# Altium PCB PCB_Octogon.PcbDoc
Units mm, origin at the board's own origin, x right, y up, seen from the top; angles counter-clockwise.
Board outline 123.02 x 122.64 mm, 2 copper layers (Top Layer, Bottom Layer); 71 components, 83 nets, 283 pads, 86 vias.
Unrouted connection lines stored in the file: 87.
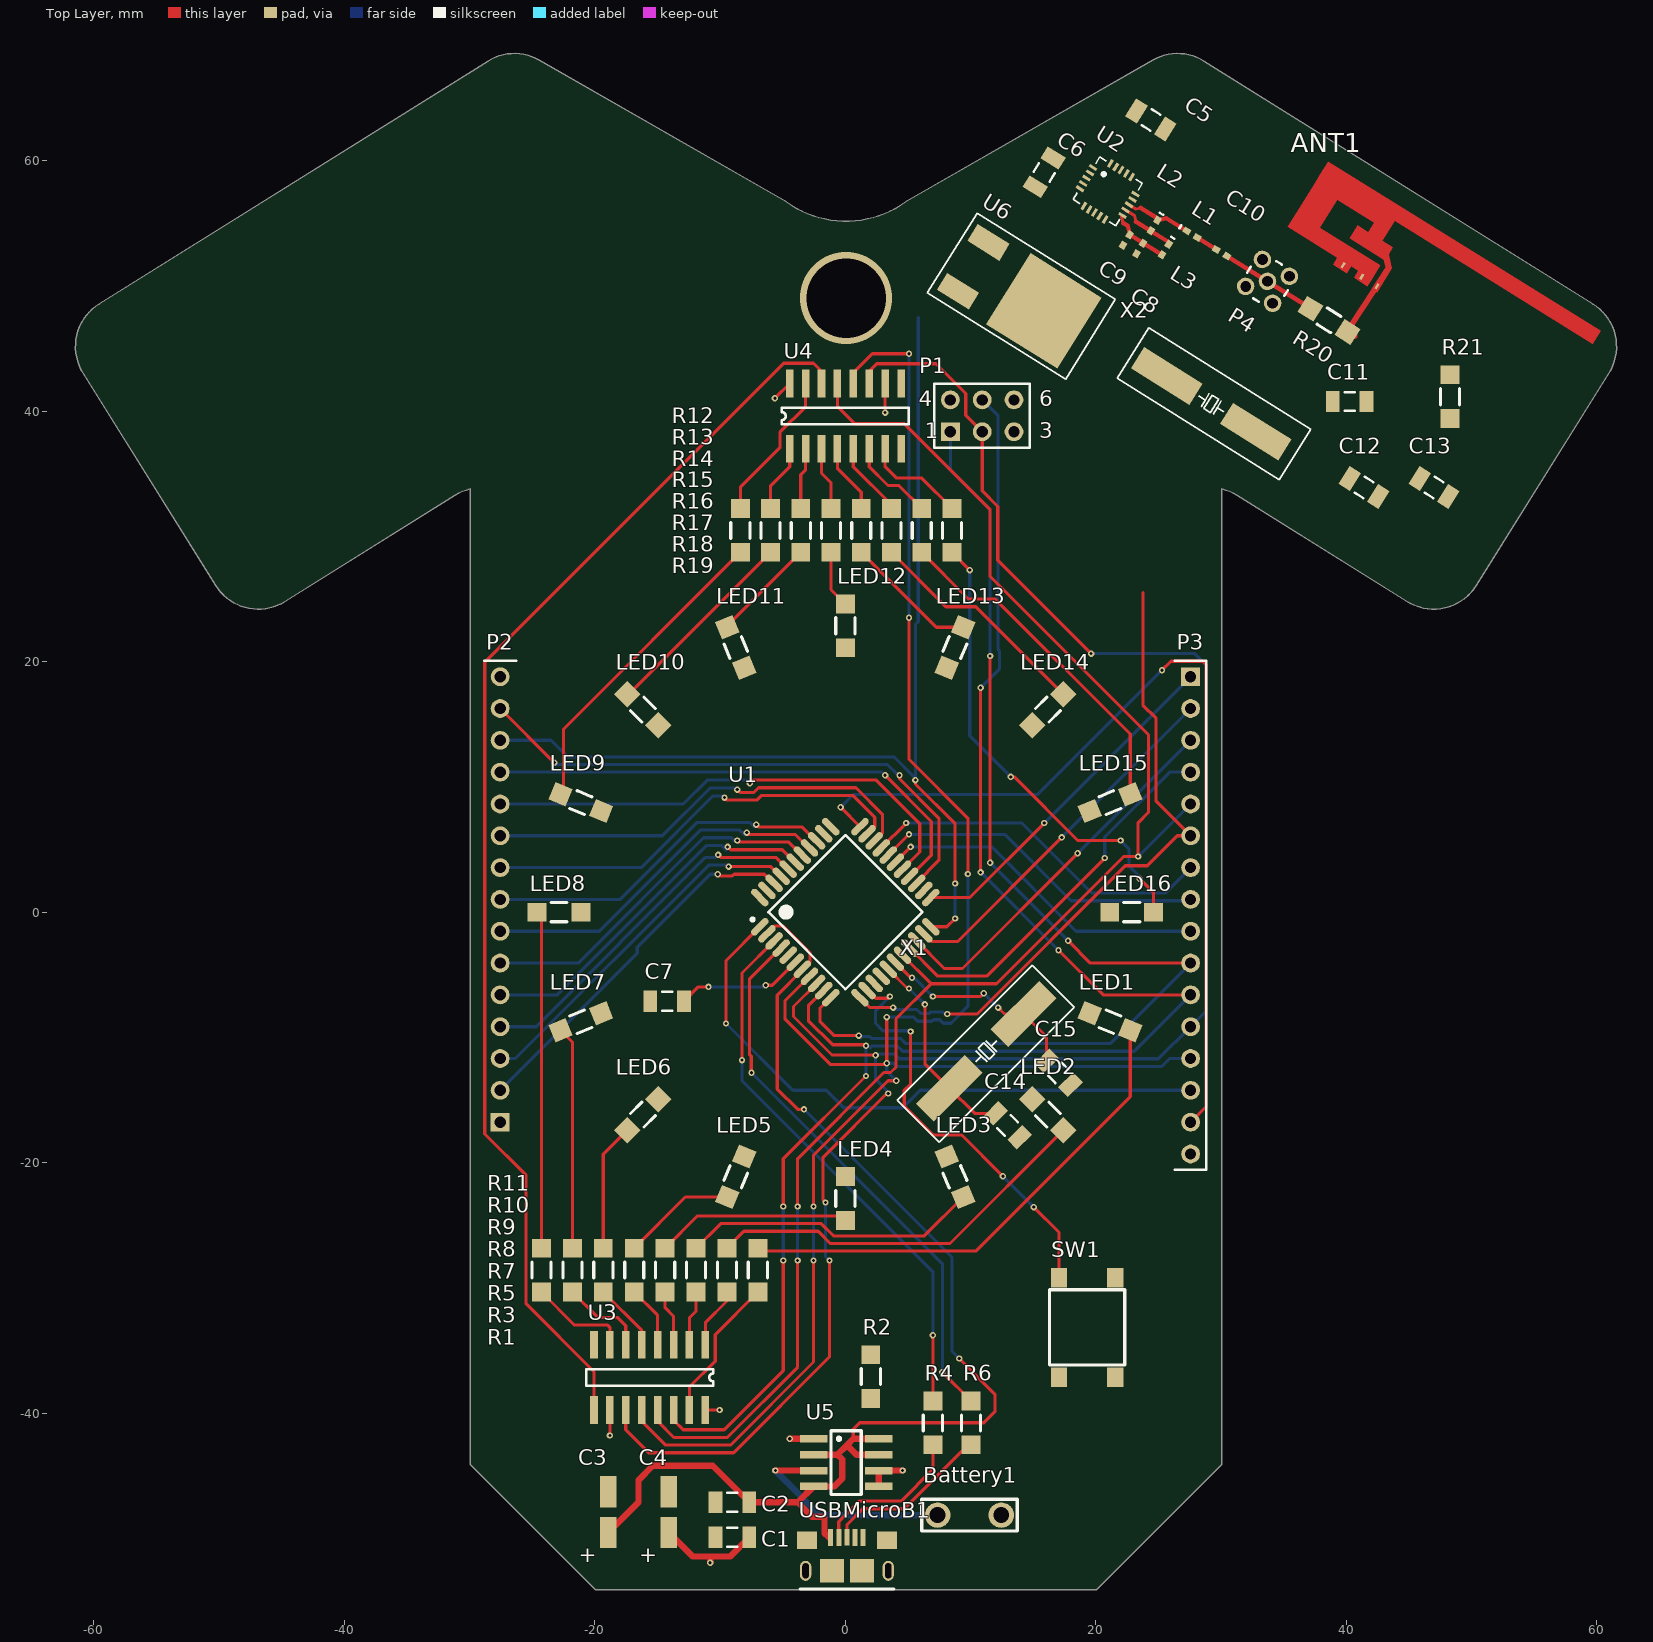
[diagram p0: Top Layer view]
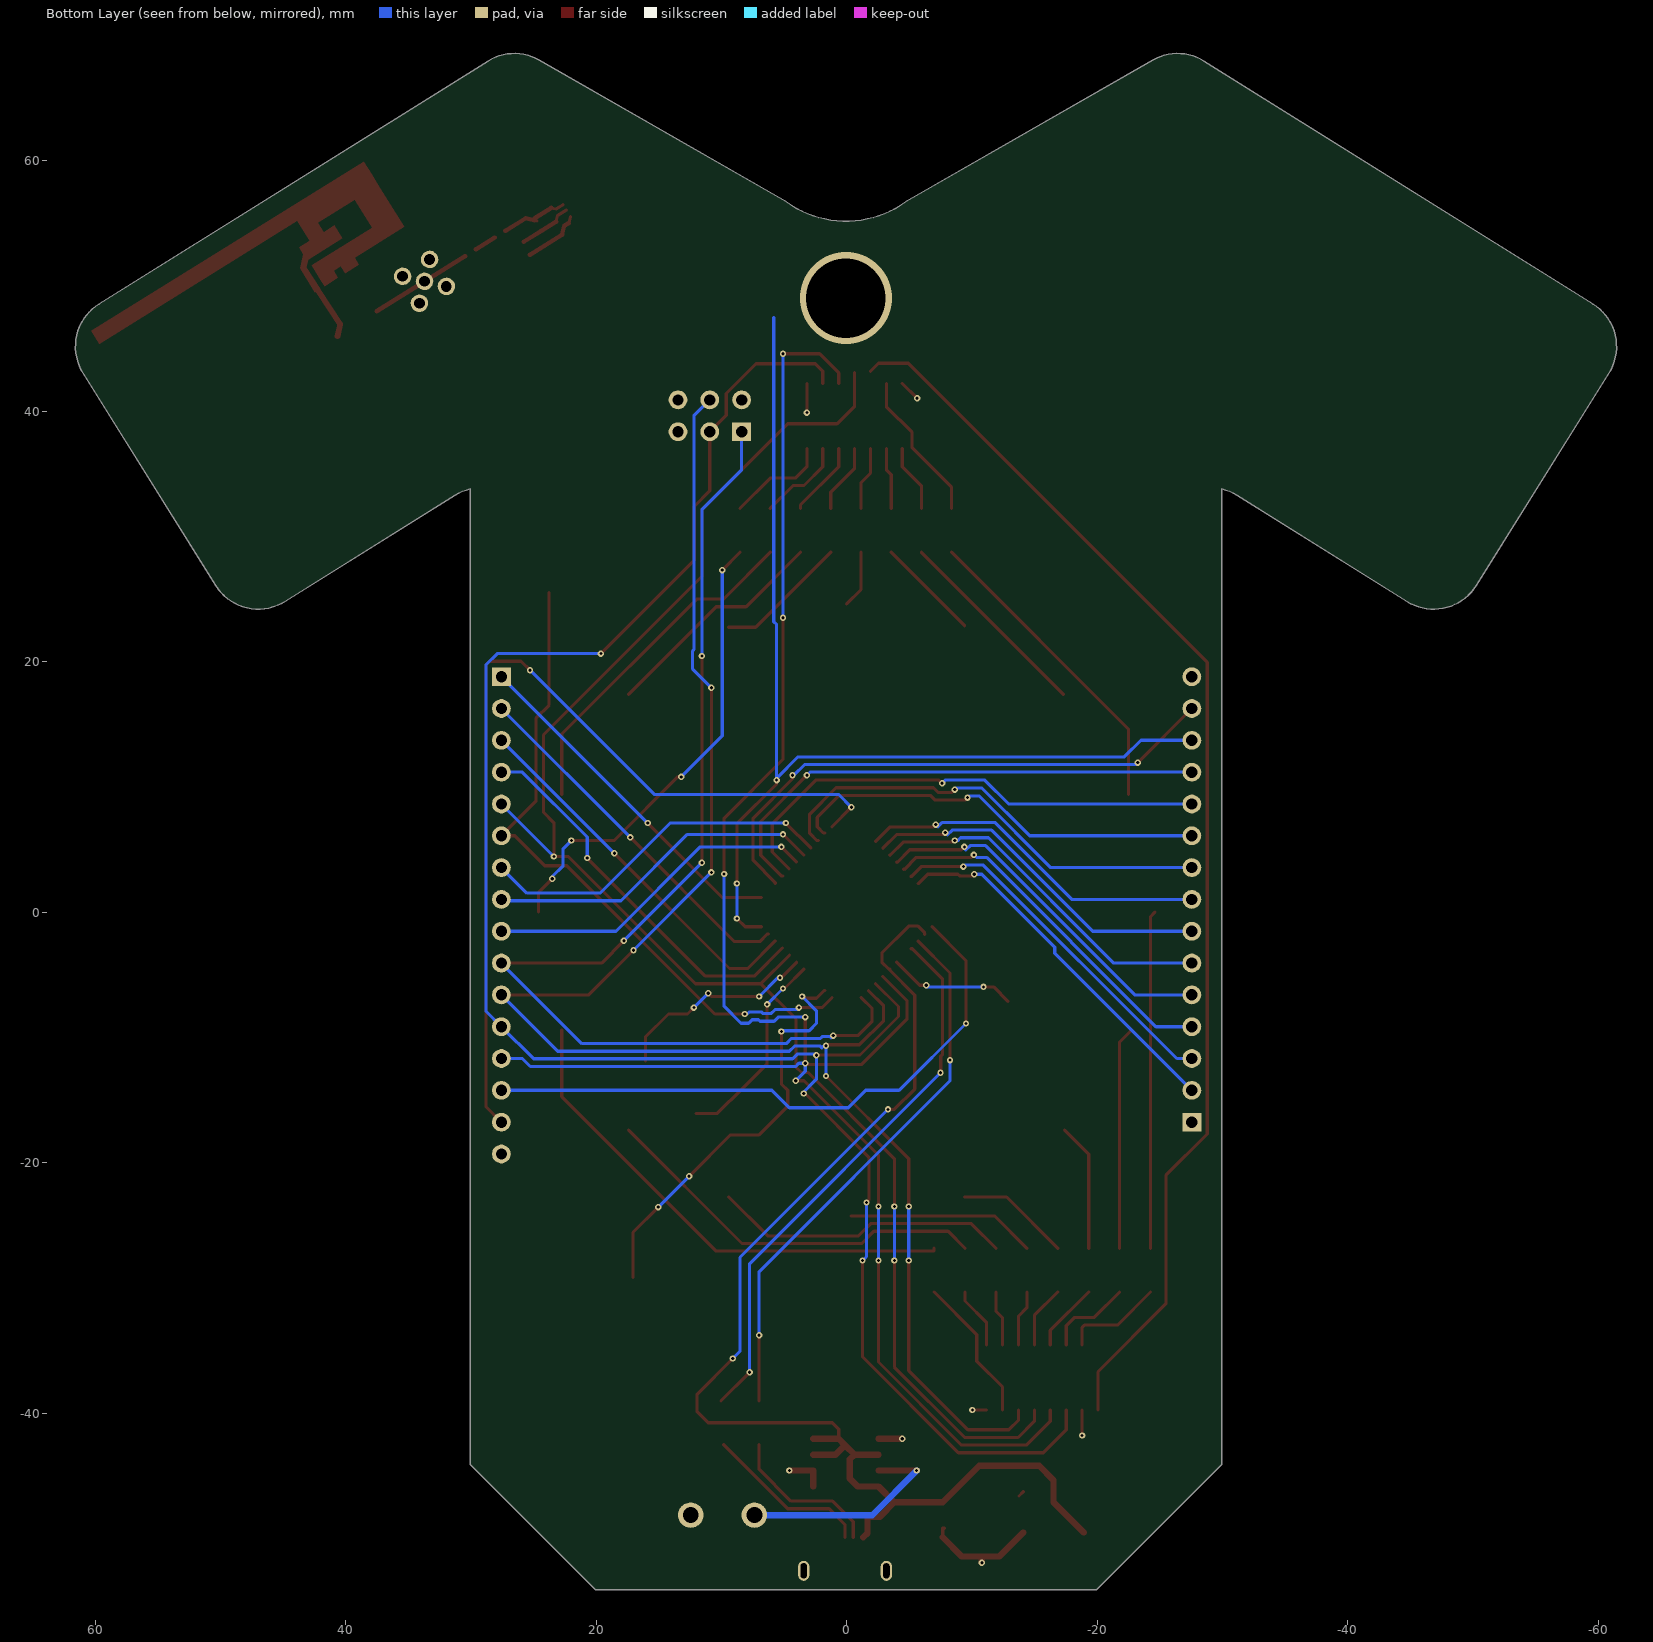
[diagram p1: Bottom Layer view, seen from below]

## Layer stack, top to bottom
Top Solder: solder mask 0.0102, Solder Resist, Dk 3.5
Top Layer: signal copper 0.0356
Dielectric 1: dielectric 0.32, FR-4, Dk 4.8
Bottom Layer: signal copper 0.0356
Bottom Solder: solder mask 0.0102, Solder Resist, Dk 3.5

## Board outline
-50.255,26.07 ccw(c-46.863,28.19) -44.744,24.798 -31.175,33.276 cw(c-29.055,29.884) -29.949,33.783 -29.949,-44.096 -19.949,-54.096 20.051,-54.096 30.051,-44.096 30.051,33.783 cw(c29.157,29.884) 31.277,33.276 44.846,24.798 ccw(c46.965,28.19) 50.358,26.07 60.956,43.031 ccw(c57.564,45.151) 59.683,48.543 28.641,67.941 ccw(c26.521,64.549) 24.532,68.019 4.847,56.736 cw(c0.051,63.218) -4.745,56.736 -24.43,68.019 ccw(c-26.419,64.549) -28.538,67.941 -59.581,48.543 ccw(c-57.462,45.151) -60.854,43.031

## Design rules (kind name [scope] priority, off if disabled: settings)
Clearance Clearance_1 [All] p1: gap=0.356
Clearance Clearance_Silk [(IsFill AND OnLayer('Top Overlay')) vs IsPad] p2: gap=0.254
PolygonConnect [All] p1: connectstyle=Relief reliefconductorwidth=0.254 reliefentries=4 polygonreliefangle="90 Angle" airgapwidth=0.254
RoomDefinition MainBoard [InComponentClass('MainBoard')] p1: confinementstyle=ConfineIn formatcopy=TRUE lockcomponents=FALSE outline 104.902,-85.979 225.044,-85.979 225.044,-42.291 104.902,-42.291
RoutingVias [All] p1: holewidth=0.254 width=0.508 viastyle="Through Hole" minholewidth=0.254 minwidth=0.508 maxholewidth=0.254 maxwidth=0.508
SolderMaskExpansion [All] p1: expansion=0.102
UnpouredPolygon [All] p1: allowunpoured=FALSE
Width [All] p1: maxlimit=1.5 minlimit=0.254 preferedwidth=0.254
29 further rules are at their usual default settings.

## Components (designator, comment, footprint, x,y, rotation, side; value= is the part's Value field where it differs from the comment)
ANT1 "INV_F_ANTENNA" INV_F_PCB_ANTENNA 35.179,54.737 r328 top
Battery1 "PowerPins" PowerPins_PCB 9.906,-48.133 r0 top
C1 "Cap Semi" C1206 -9.017,-49.911 r0 top
C2 "Cap Semi" C1206 -9.017,-47.117 r0 top
C3 "Electrolytic Capacitor" sheityCapPackage -18.923,-49.149 r0 top
C4 "Electrolytic Capacitor" sheityCapPackage -14.097,-49.149 r0 top
C5 "Cap Semi" C1206 24.384,63.246 r148 top
C6 "Cap Semi" C1206 15.875,59.055 r238 top
C7 "Cap Semi" C1206 -14.224,-7.112 r180 top
C8 "Cap Semi" 0402 23.509,52.977 r58 top
C9 "Cap Semi" 0402 22.432,53.65 r58 top
C10 "Cap Semi" 0402 30.038,52.641 r148 top
C11 "Cap Semi" C1206 40.259,40.767 r0 top
C12 "Cap Semi" C1206 41.402,33.909 r328 top
C13 "Cap Semi" C1206 46.99,33.909 r328 top
C14 "Cap Semi" C1206 12.954,-17.018 r315 top
C15 "Cap Semi" C1206 17.018,-12.827 r315 top
L1 "Inductor" 0402-A 27.669,54.122 r328 top
L2 "Inductor" 0402-A 24.653,54.808 r238 top
L3 "Inductor" 0402-A 25.555,52.896 r238 top
LED1 "LED_Green_1206Package" 1206Package_PCB 21.12,-8.748 r157.5 top
LED2 "LED_Green_1206Package" 1206Package_PCB 16.164,-16.164 r135 top
LED3 "LED_Green_1206Package" 1206Package_PCB 8.748,-21.12 r112.5 top
LED4 "LED_Green_1206Package" 1206Package_PCB 0,-22.86 r90 top
LED5 "LED_Green_1206Package" 1206Package_PCB -8.748,-21.12 r67.5 top
LED6 "LED_Green_1206Package" 1206Package_PCB -16.164,-16.164 r45 top
LED7 "LED_Green_1206Package" 1206Package_PCB -21.12,-8.748 r22.5 top
LED8 "LED_Green_1206Package" 1206Package_PCB -22.86,0 r0 top
LED9 "LED_Green_1206Package" 1206Package_PCB -21.12,8.748 r337.5 top
LED10 "LED_Green_1206Package" 1206Package_PCB -16.164,16.164 r315 top
LED11 "LED_Green_1206Package" 1206Package_PCB -8.748,21.12 r292.5 top
LED12 "LED_Green_1206Package" 1206Package_PCB 0,22.86 r270 top
LED13 "LED_Green_1206Package" 1206Package_PCB 8.748,21.12 r247.5 top
LED14 "LED_Green_1206Package" 1206Package_PCB 16.164,16.164 r225 top
LED15 "LED_Green_1206Package" 1206Package_PCB 21.12,8.748 r202.5 top
LED16 "LED_Green_1206Package" 1206Package_PCB 22.86,0 r180 top
P1 "Header 3X2A" HDR2X3_CEN 8.382,38.354 r0 top
P2 "Header 15" HDR1X15 -27.559,-16.764 r90 top
P3 "Header 16" HDR1X16 27.559,18.796 r270 top
P4 "COAX-M" MMCX2.54-V5 33.7,50.353 r328 top
R1 "Resistor_1206Package" 1206Package_PCB -6.985,-28.575 r90 top
R2 "Resistor_1206Package" 1206Package_PCB 2.032,-37.084 r270 top
R3 "Resistor_1206Package" 1206Package_PCB -9.452,-28.575 r90 top
R4 "Resistor_1206Package" 1206Package_PCB 6.985,-40.767 r270 top
R5 "Resistor_1206Package" 1206Package_PCB -11.92,-28.575 r90 top
R6 "Resistor_1206Package" 1206Package_PCB 10.033,-40.767 r270 top
R7 "Resistor_1206Package" 1206Package_PCB -14.387,-28.575 r90 top
R8 "Resistor_1206Package" 1206Package_PCB -16.855,-28.575 r90 top
R9 "Resistor_1206Package" 1206Package_PCB -19.322,-28.575 r90 top
R10 "Resistor_1206Package" 1206Package_PCB -21.79,-28.575 r90 top
R11 "Resistor_1206Package" 1206Package_PCB -24.257,-28.575 r90 top
R12 "Resistor_1206Package" 1206Package_PCB -8.382,30.48 r270 top
R13 "Resistor_1206Package" 1206Package_PCB -5.969,30.48 r270 top
R14 "Resistor_1206Package" 1206Package_PCB -3.556,30.48 r270 top
R15 "Resistor_1206Package" 1206Package_PCB -1.143,30.48 r270 top
R16 "Resistor_1206Package" 1206Package_PCB 1.27,30.48 r270 top
R17 "Resistor_1206Package" 1206Package_PCB 3.683,30.48 r270 top
R18 "Resistor_1206Package" 1206Package_PCB 6.096,30.48 r270 top
R19 "Resistor_1206Package" 1206Package_PCB 8.509,30.48 r270 top
R20 "Resistor_1206Package" 1206Package_PCB 38.608,47.244 r328 top
R21 "Resistor_1206Package" 1206Package_PCB 48.26,41.148 r90 top
SW1 "PushButton" TactileSwitchPCB 19.304,-33.147 r90 top
U1 "ATmega32U4-AU" 44ML_N 0,0 r45 top
U2 "nRF24L01+" 20-VFQFN 19.039,56.369 r328 top
U3 "8BitShiftReg" 16-SOIC -11.176,-34.544 r270 top
U4 "8BitShiftReg" 16-SOIC -4.445,37 r90 top
U5 "DualNP-ChFET" 8-SOIC -2.54,-45.847 r0 top
U6 "LD1117DT33TR" DPAK 11.43,53.467 r238 top
USBMicroB1 "Micro USB Receptacle Type B" USBMicroB_PCB 0.127,-52.578 r0 top
X1 "HC-49S" HC-49S 14.224,-8.128 r225 top
X2 "HC-49S" HC-49S 25.654,42.799 r328 top

## Footprints (in the part's own frame and the unit in brackets; to place one, negate y for a bottom-side part, rotate by r counter-clockwise, add the part's x,y. Pads: shape width x height; smd on the part's side, far side on the other; paste and mask are expansions set on the pad)
8-SOIC [mm]
  rect 2.2x0.6 smd: 1(0,3.81) 2(0,2.54) 3(0,1.27) 4(0,0) 5(5.2,0) 6(5.2,1.27) 7(5.2,2.54) 8(5.2,3.81)
  silkscreen extent 1.4,-0.64 3.81,4.44
16-SOIC [mm]
  rect 2.2x0.6 smd: 1(0,0) 2(0,-1.27) 3(0,-2.54) 4(0,-3.81) 5(0,-5.08) 6(0,-6.35) 7(0,-7.62) 8(0,-8.89) 9(5.2,-8.89) 10(5.2,-7.62) 11(5.2,-6.35) 12(5.2,-5.08) 13(5.2,-3.81) 14(5.2,-2.54) 15(5.2,-1.27) 16(5.2,0)
  silkscreen extent 1.94,-9.53 3.27,0.64
20-VFQFN [mm] "The package"
  rect 0.7x0.25 smd: 1(-1,3) 2(-1,2.5) 3(-1,2) 4(-1,1.5) 5(-1,1) 11(3,1) 12(3,1.5) 13(3,2) 14(3,2.5) 15(3,3)
  rect 0.25x0.7 smd: 6(0,0) 7(0.5,0) 8(1,0) 9(1.5,0) 10(2,0) 16(2,4) 17(1.5,4) 18(1,4) 19(0.5,4) 20(0,4)
  silkscreen extent -1,0 3,4
44ML_N [mm] "Thin QFP, 44-Leads, Body 10x10mm, Pitch 0.8mm, IPC Medium Density"
  oval 1.75x0.55 smd: 1(-5.65,4) 2(-5.65,3.2) 3(-5.65,2.4) 4(-5.65,1.6) 5(-5.65,0.8) 6(-5.65,0) 7(-5.65,-0.8) 8(-5.65,-1.6) 9(-5.65,-2.4) 10(-5.65,-3.2) 11(-5.65,-4) 23(5.65,-4) 24(5.65,-3.2) 25(5.65,-2.4) 26(5.65,-1.6) 27(5.65,-0.8) 28(5.65,0) 29(5.65,0.8) 30(5.65,1.6) 31(5.65,2.4) 32(5.65,3.2) 33(5.65,4)
  oval 0.55x1.75 smd: 12(-4,-5.65) 13(-3.2,-5.65) 14(-2.4,-5.65) 15(-1.6,-5.65) 16(-0.8,-5.65) 17(0,-5.65) 18(0.8,-5.65) 19(1.6,-5.65) 20(2.4,-5.65) 21(3.2,-5.65) 22(4,-5.65) 34(4,5.65) 35(3.2,5.65) 36(2.4,5.65) 37(1.6,5.65) 38(0.8,5.65) 39(0,5.65) 40(-0.8,5.65) 41(-1.6,5.65) 42(-2.4,5.65) 43(-3.2,5.65) 44(-4,5.65)
  silkscreen extent -5.77,-4.35 4.35,4.95, body extent -5,-5 5,5, height 1.2
0402 [mm] "Chip Capacitor, Body 1.0x0.5mm, IPC High Density"
  rect 0.6x0.5 smd: 1(-0.5,0) 2(0.5,0)
  body extent -0.55,-0.3 0.55,0.3, height 1.3
0402-A [mm] "Chip Inductor, Body 1.0x0.5mm, IPC High Density"
  rect 0.6x0.5 smd: 1(-0.5,0) 2(0.5,0)
  silkscreen extent -1.1,-0.15 -1.1,0.15, body extent -0.55,-0.3 0.55,0.3, height 0.55
1206Package_PCB [mm]
  rect 1.5x1.5 smd: 1(-1.75,0) 2(1.75,0)
  silkscreen extent -0.64,-0.76 0.64,0.76
C1206 [mm] "Chip Capacitor, Body 3.2x1.6mm, IPC High Density"
  rect 1.1x1.7 smd: 1(-1.35,0) 2(1.35,0)
  silkscreen extent -0.4,-0.75 0.4,0.75, body extent -1.7,-0.9 1.7,0.9, height 1.3
DPAK [mm]
  rect 1.6x3 smd: 1(0,0) 3(4.6,0)
  rect 6.7x6.7 smd: 2(2.3,6.65)
  silkscreen extent -1.5,-2 6,11
HC-49S [mm]
  rect 5.5x2 smd: 1(0,0) 2(8.375,0)
  silkscreen extent -3.25,-2.25 12,2.5
HDR1X15 [mm] "Connector; Header; 15 Position"
  rect 1.5x1.5 hole 0.9: 1(0,0)
  round 1.5 hole 0.9: 2(2.54,0) 3(5.08,0) 4(7.62,0) 5(10.16,0) 6(12.7,0) 7(15.24,0) 8(17.78,0) 9(20.32,0) 10(22.86,0) 11(25.4,0) 12(27.94,0) 13(30.48,0) 14(33.02,0) 15(35.56,0)
  silkscreen extent 36.83,-1.27 36.83,1.27
HDR1X16 [mm] "Connector; Header; 16 Position"
  rect 1.5x1.5 hole 0.9: 1(0,0)
  round 1.5 hole 0.9: 2(2.54,0) 3(5.08,0) 4(7.62,0) 5(10.16,0) 6(12.7,0) 7(15.24,0) 8(17.78,0) 9(20.32,0) 10(22.86,0) 11(25.4,0) 12(27.94,0) 13(30.48,0) 14(33.02,0) 15(35.56,0) 16(38.1,0)
  silkscreen extent -1.27,-1.27 39.37,1.27
HDR2X3_CEN [mm] "Connector; Header; 3x2 Position"
  rect 1.5x1.5 hole 0.9: 1(0,0)
  round 1.5 hole 0.9: 2(2.54,0) 3(5.08,0) 4(0,2.54) 5(2.54,2.54) 6(5.08,2.54)
  silkscreen extent -1.27,-1.27 6.35,3.81
INV_F_PCB_ANTENNA [mm]
  rect 0.2x0.5 smd: 1(5.5,-0.2) 2(7.25,-0.2) 3(8.696,-0.2)
  Top Layer region: 0.127,0.043 0.127,0.04 0.129,0.038 0.131,0.037 0.133,0.036 0.133,0.036 4.81,0.047 4.81,-0.598 4.811,-0.6 4.812,-0.602 4.814,-0.604 4.817,-0.604 4.817,-0.604 6.077,-0.601 6.081,-0.6 6.083,-0.598 6.084,-0.595 6.084,-0.595 6.084,0.05 6.775,0.052 6.775,-0.593 6.776,-0.596 6.777,-0.598 6.779,-0.599 6.782,-0.6 6.782,-0.6 8.016,-0.597 8.02,-0.596 8.022,-0.593 8.023,-0.59 8.023,-0.59 8.023,-0.033 8.023,1.343 8.022,1.346 8.021,1.348 8.019,1.35 8.016,1.35 8.016,1.35 2.32,1.337 2.32,3.977 5.81,3.985 5.81,3.109 4.817,3.107 4.814,3.106 4.811,3.103 4.81,3.1 4.81,3.1 4.81,1.897 4.811,1.895 4.812,1.893 4.814,1.891 4.817,1.891 4.817,1.891 8.014,1.898 8.459,1.456 8.459,-0.589 8.46,-0.592 8.461,-0.594 8.463,-0.595 8.466,-0.596 8.466,-0.596 8.926,-0.595 8.929,-0.594 8.932,-0.591 8.933,-0.588 8.933,-0.588 8.933,1.649 8.932,1.652 8.931,1.654 8.931,1.654 8.931,1.654 8.931,1.654 8.931,1.654 8.931,1.654 8.931,1.654 8.118,2.46 8.118,3.108 8.118,3.11 8.116,3.112 8.114,3.114 8.112,3.114 8.112,3.114 7.119,3.112 7.119,3.995 7.119,4.982 25.708,5.026 25.711,5.027 25.713,5.029 25.714,5.032 25.714,5.032 25.714,6.235 25.714,6.238 25.712,6.24 25.71,6.241 25.708,6.242 25.708,6.242 0.134,6.182 0.13,6.181 0.128,6.179 0.127,6.176 0.127,6.176 0.127,4.973 0.127,3.979 0.127,1.325
MMCX2.54-V5 [mm] "Connector; RF Coaxial, MMCX, Thru-Hole; 5 Position; Vertical"
  round 1.4 hole 0.85: 1(0,0) 2(-1.27,-1.27) 3(1.27,-1.27) 4(1.27,1.27) 5(-1.27,1.27)
  silkscreen extent -1.75,-1.75 1.75,1.75
PowerPins_PCB [mil]
  round 80 hole 50: 1(-100,0) 2(100,0)
  silkscreen extent -150,-50 150,50
sheityCapPackage [mm] "This is jank"
  rect 1.3x2.5 smd: 1(0,-0.375) 2(0,2.875)
TactileSwitchPCB [mm]
  rect 1.55x1.3 smd: 1(-3.975,2.25) 2(3.975,2.25) 3(-3.975,-2.25) 4(3.975,-2.25)
  silkscreen extent -3,-3 3,3
USBMicroB_PCB [mm]
  rect 0.4x1.35 smd: 1(-1.3,2.667) 2(-0.65,2.667) 3(0,2.675) 4(0.65,2.667) 5(1.3,2.667)
  oval 0.9x1.6 hole 0.5 slot 1.2 at 90 deg: CASE(-3.3,0) CASE(3.3,0)
  rect 1.6x1.4 smd: CASE(-3.2,2.45) CASE(3.2,2.45)
  rect 1.9x1.9 smd: CASE(-1.2,0) CASE(1.2,0)
  silkscreen extent -3.75,-1.45 3.75,-1.45

## Part data
ANT1: library part INV_V_ANTENNA
C1 C2 C5 C6 C7 C8 C9 C10 C11 C12 C13 C14 C15: "Capacitor (Semiconductor SIM Model)"
C3 C4: "asdf"
LED1 LED2 LED3 LED4 LED5 LED6 LED7 LED8 LED9 LED10 LED11 LED12 LED13 LED14 LED15 LED16: "Green LED"
P1: "Header, 3-Pin, Dual row"
P2: "Header, 15-Pin"
P3: "Header, 16-Pin"
P4: "RF Coaxial PCB Connector, MMCX; Thru-Hole, Vertical Mount Plug,  50 Ohm Impedance"
R1 R2 R3 R4 R5 R6 R7 R8 R9 R10 R11 R12 R13 R14 R15 R16 R17 R18 R19 R20 R21: "Resistor 1206"
SW1: library part TactileButton, "Normally open push button."
U1: "8-bit AVR Microcontroller, 2.7-5.5V, 32KB Flash, 2.5KB EEPROM, 1KB SRAM, USB Controller, 44-pin TQFP, Industrial Grade (-40°C to 85°C)"
U2: "2.4GHz RF Transceiver"
U3 U4: library part 8BitShiftRegister
U5: library part "Dual N & P-Channel MOSFET"
USBMicroB1: library part USBMicroB

## Via types
v1: diameter 0.508, hole 0.254, Top Layer to Bottom Layer, 85 vias
v2: diameter 7.35, hole 6.35, Top Layer to Bottom Layer, 1 vias

## Nets (pads, with @x,y where several pads share a name; then routed paths per layer and width w, separated by ;. In a path a pad name is that pad's centre, name@x,y a point inside that pad or via, vN(x,y) a via of type N, cw(c..) or ccw(c..) an arc to the next point about the centre after c; other vN are vias at no path point)
3V3: C6.2 U2.7 U2.15 U2.18 U2.19 U6.2
ANT1: L2.2 L3.1 U2.12 | length 4.4
  Top Layer w0.254: U2.12 23.085,55.609 23.197,55.128
  Top Layer w0.356: 23.197,55.128 L2.2 L3.1@25.775,53.517
ANT2: L1.1 L2.1 U2.13 | length 5.4
  Top Layer w0.254: U2.13 23.195,56.13 23.589,56.221 ; L2.1@24.71,55.184 L2.1
  Top Layer w0.356: 23.589,56.221 L2.1@24.875,55.418 ; L2.1 25.629,55.396 L1.1
BATT: Battery1.1 U5.3 | length 17.5
  Top Layer w0.508: v1(-5.588,-44.577) U5.3
  Bottom Layer w0.508: v1(-5.588,-44.577) -2.032,-48.133 Battery1.1
D+: R6.1 U1.4 | length 44.5
  Top Layer w0.254: v1(-7.493,-12.827) -7.518,-12.802 -7.518,-11.506 -7.645,-11.379 -7.645,-5.323 -5.246,-2.924 U1.4@-5.127,-2.924 ; v1(7.747,-36.73) R6.1
  Bottom Layer w0.254: v1(-7.493,-12.827) 7.747,-28.067 v1(7.747,-36.73)
D-: R4.1 U1.3 | length 44.1
  Top Layer w0.254: v1(-8.255,-11.811) -8.255,-4.861 U1.3 ; R4.1 v1(6.985,-33.782)
  Bottom Layer w0.254: v1(-8.255,-11.811) -8.255,-13.462 6.985,-28.702 v1(6.985,-33.782)
GND: ANT1.1 ANT1.2 Battery1.2 C1.1 C2.1 C3.2 C4.2 C5.1 C6.1 C7.2 C8.1 C9.1 C11.2 C12.1 C13.1 C14.2 C15.2 LED1.2 LED2.2 LED3.2 LED4.2 LED5.2 LED6.2 LED7.2 LED8.2 LED9.2 LED10.2 LED11.2 LED12.2 LED13.2 LED14.2 LED15.2 LED16.2 P1.6 P2.15 P3.1 P4.2 P4.3 P4.4 P4.5 R2.1 R21.2 SW1.3 SW1.4 U1.5 U1.15 U1.23 U1.35 U1.43 U2.8 U2.14 U2.17 U2.20 U3.8 U4.8 U6.1 USBMicroB1.5 | length 28.5
  Top Layer w0.254: C4.2 C4.2@-13.762,-46.609 ; U1.23 9.93,1.167 v1(15.875,7.112)
  Bottom Layer w0.254: v1(15.875,7.112) P3.1
MISO: P1.1 P3.10 U1.11 U2.5 | length 90.4
  Top Layer w0.254: U1.11 -2.032,-7.689 -2.032,-8.717 -0.893,-9.855 v1(1.067,-9.855) ; v1(11.557,3.937) v1(11.557,20.447) ; v1(17.78,-2.286) 19.558,-4.064 P3.10
  Bottom Layer w0.254: v1(1.067,-9.855) 1.244,-10.033 1.346,-9.931 1.956,-9.931 2.109,-10.084 4.415,-10.084 4.822,-10.49 21.133,-10.49 P3.10 ; P1.1 8.382,35.306 11.557,32.131 v1(11.557,20.447) ; v1(11.557,3.937) v1(17.78,-2.286)
MOSI: P1.5 P3.11 U1.10 U2.4 U3.14 | length 136.7
  Top Layer w0.254: U3.14 -13.716,-40.556 -12.946,-41.327 -9.678,-41.327 -4.953,-36.602 v1(-4.953,-27.813) ; v1(-4.953,-23.495) -4.953,-19.685 v1(1.651,-13.081) ; U1.10 -2.948,-7.473 -2.948,-8.663 -1.019,-10.592 1.575,-10.592 v1(1.651,-10.668) ; v1(10.795,3.175) v1(10.795,17.907) ; v1(17.018,-3.048) 20.574,-6.604 P3.11
  Bottom Layer w0.254: v1(-4.953,-27.813) v1(-4.953,-23.495) ; v1(1.651,-13.081) v1(1.651,-10.668) 1.626,-10.693 1.856,-10.693 1.982,-10.819 2.108,-10.693 4.163,-10.693 4.569,-11.1 23.063,-11.1 P3.11 ; v1(10.795,3.175) v1(17.018,-3.048) ; v1(10.795,17.907) 12.294,19.406 12.294,20.854 12.192,20.955 12.192,39.624 P1.5
NetANT1_3: ANT1.3 R20.2 | length 5.6
  Top Layer w0.46: R20.2@40.64,45.974 40.438,46.948 42.956,50.78
NetC7_1: C7.1 U1.6 | length 10.2
  Top Layer w0.254: C7.1 -11.731,-5.969 v1(-10.922,-5.969) ; v1(-6.35,-5.842) -5.842,-5.842 U1.6
  Bottom Layer w0.254: v1(-10.922,-5.969) -6.35,-5.969 v1(-6.35,-5.842)
NetC10_1: C10.1 C11.1 P4.1 R20.1 | length 8.3
  Top Layer w0.356: C10.1 P4.1 R20.1@37.493,47.983
NetC10_2: C10.2 L1.2 | length 1.8
  Top Layer w0.356: L1.2 C10.2
NetC12_2: C12.2 U2.9 X2.1
NetC13_2: C13.2 U2.10 X2.2
NetC14_1: C14.1 U1.16 X1.2 | length 16.1
  Top Layer w0.254: U1.16 4.965,-6.096 v1(5.08,-6.096) ; v1(6.35,-7.366) 6.35,-12.098 X1.2 10.315,-16.063 C14.1
  Bottom Layer w0.254: v1(5.08,-6.096) v1(6.35,-7.366)
NetC15_1: C15.1 U1.17 X1.1 | length 16.7
  Top Layer w0.254: U1.17 5.232,-5.232 v1(5.322,-5.232) ; v1(6.985,-6.731) 10.795,-6.731 v1(11.049,-6.477) ; v1(12.192,-7.62) 12.7,-8.128 X1.1 16.063,-9.967 C15.1
  Bottom Layer w0.254: v1(5.322,-5.232) 5.486,-5.232 v1(6.985,-6.731) ; v1(11.049,-6.477) v1(12.192,-7.62)
NetLED1_1: LED1.1 R1.2 | length 40.4
  Top Layer w0.254: R1.2 -6.985,-27.062 10.403,-27.062 22.737,-14.728 LED1.1
NetLED2_1: LED2.1 R3.2 | length 31.6
  Top Layer w0.254: R3.2 -8.104,-25.476 -2.178,-25.476 -1.202,-26.452 8.352,-26.452 LED2.1
NetLED3_1: LED3.1 R5.2 | length 23.8
  Top Layer w0.254: R5.2 -9.961,-24.867 -1.926,-24.867 -0.95,-25.843 6.312,-25.843 LED3.1
NetLED4_1: LED4.1 R7.2 | length 15.1
  Top Layer w0.254: R7.2 -11.819,-24.257 LED4.1@-0.353,-24.257
NetLED5_1: LED5.1 R8.2 | length 9.1
  Top Layer w0.254: R8.2 -12.766,-22.737 LED5.1
NetLED6_1: LED6.1 R9.2 | length 10.2
  Top Layer w0.254: R9.2 -19.322,-19.322 LED6.1
NetLED7_1: LED7.1 R10.2 | length 17.8
  Top Layer w0.254: LED7.1 -21.79,-10.365 R10.2
NetLED8_1: LED8.1 R11.2 | length 27
  Top Layer w0.254: LED8.1 -24.257,-0.353 R11.2
NetLED9_1: LED9.1 R12.2 | length 25.2
  Top Layer w0.254: LED9.1@-22.504,9.418 -22.504,14.608 R12.2
NetLED10_1: LED10.1 R13.2 | length 16
  Top Layer w0.254: LED10.1@-17.297,17.402 R13.2
NetLED11_1: LED11.1 R14.2 | length 8.3
  Top Layer w0.254: LED11.1@-9.418,22.868 R14.2
NetLED12_1: LED12.1 R15.2 | length 4.6
  Top Layer w0.254: R15.2 -1.143,25.753 LED12.1
NetLED13_1: LED13.1 R16.2 | length 10.6
  Top Layer w0.254: R16.2 7.263,22.737 LED13.1
NetLED14_1: LED14.1 R17.2 | length 18.4
  Top Layer w0.254: R17.2 8.029,24.384 10.42,24.384 LED14.1
NetLED15_1: LED15.1 R18.2 | length 27.5
  Top Layer w0.254: R18.2 9.832,24.994 11.963,24.994 22.737,14.22 LED15.1
NetLED16_1: LED16.1 R19.2 | length 37.6
  Top Layer w0.254: R19.2 v1(9.934,27.305) ; v1(13.208,10.795) 13.488,10.795 18.568,5.715 v1(21.971,5.715) ; v1(23.495,2.667) 24.61,1.552 LED16.1
  Bottom Layer w0.254: v1(9.934,27.305) 9.934,14.069 v1(13.208,10.795) ; v1(21.971,5.715) 22.631,5.055 22.631,3.708 23.495,2.845 v1(23.495,2.667)
NetP2_2: P2.2 U1.42 | length 29.7
  Top Layer w0.254: v1(-10.185,3.023) -10.058,2.896 -9.017,2.896 -8.89,3.023 -6.477,3.023 -5.752,2.298 U1.42
  Bottom Layer w0.254: P2.2 -16.612,-3.277 -16.612,-2.795 -10.794,3.023 v1(-10.185,3.023)
NetP2_3: P2.3 U1.41 | length 29.2
  Top Layer w0.254: v1(-9.322,3.632) -5.955,3.632 -5.157,2.834 U1.41
  Bottom Layer w0.254: P2.3 -26.362,-11.684 -10.919,3.759 -9.449,3.759 v1(-9.322,3.632)
NetP2_4: P2.4 U1.40 | length 29.2
  Top Layer w0.254: v1(-10.16,4.572) -9.957,4.369 -5.56,4.369 -4.591,3.399 U1.40
  Bottom Layer w0.254: P2.4 -24.684,-9.144 -11.172,4.369 -10.363,4.369 v1(-10.16,4.572)
NetP2_5: P2.5 U1.39 | length 29.3
  Top Layer w0.254: v1(-9.398,5.207) -9.169,4.978 -5.038,4.978 -4.025,3.965 U1.39
  Bottom Layer w0.254: P2.5 -23.006,-6.604 -11.094,5.309 -9.855,5.309 -9.512,4.966 -9.398,5.08 v1(-9.398,5.207)
NetP2_6: P2.6 U1.38 | length 28.9
  Top Layer w0.254: v1(-8.636,5.715) -8.509,5.588 -4.517,5.588 -3.459,4.531 U1.38
  Bottom Layer w0.254: P2.6 -21.329,-4.064 -11.321,5.944 -9.093,5.944 -8.864,5.715 v1(-8.636,5.715)
NetP2_7: P2.7 U1.37 | length 28.8
  Top Layer w0.254: v1(-7.874,6.35) -7.722,6.198 -3.995,6.198 U1.37@-2.894,5.097
  Bottom Layer w0.254: P2.7 -19.651,-1.524 -11.573,6.553 -8.432,6.553 -8.052,6.172 v1(-7.874,6.35)
NetP2_8: P2.8 U1.36 | length 28.5
  Top Layer w0.254: v1(-7.112,6.985) -6.934,6.807 -3.473,6.807 U1.36@-2.328,5.662
  Bottom Layer w0.254: P2.8 -17.973,1.016 -11.826,7.163 -7.645,7.163 -7.29,6.807 v1(-7.112,6.985)
NetP2_9: P2.9 U1.32 | length 34.9
  Top Layer w0.254: v1(-9.652,9.144) -9.449,8.941 -7.062,8.941 -6.681,9.322 0.588,9.322 2.349,7.562 2.349,6.814 1.852,6.318 U1.32@1.732,6.318
  Bottom Layer w0.254: P2.9 -16.295,3.556 -10.58,9.271 -9.779,9.271 v1(-9.652,9.144)
NetP2_10: P2.10 U1.31 | length 35.7
  Top Layer w0.254: v1(-8.636,9.779) -8.407,9.55 -7.315,9.55 -6.934,9.931 0.841,9.931 ; 0.892,9.881 2.958,7.814 2.958,6.292 2.388,5.722 U1.31@2.268,5.722
  Bottom Layer w0.254: P2.10 -14.617,6.096 -10.807,9.906 -8.763,9.906 v1(-8.636,9.779)
NetP2_11: P2.11 U1.27 | length 40.1
  Top Layer w0.254: v1(-7.62,10.287) -7.366,10.541 2.462,10.541 5.944,7.059 5.944,4.801 U1.27@4.602,3.459
  Bottom Layer w0.254: P2.11 -12.939,8.636 -11.034,10.541 -7.874,10.541 v1(-7.62,10.287)
NetP2_12: P2.12 U1.26 | length 41.2
  Top Layer w0.254: v1(3.175,10.922) 6.858,7.239 6.858,4.535 5.216,2.894 U1.26@5.097,2.894
  Bottom Layer w0.254: P2.12 2.921,11.176 v1(3.175,10.922)
NetP2_14: P2.14 U1.25 | length 44.8
  Top Layer w0.254: P2.14 v1(-23.241,11.938) ; v1(4.318,10.922) 4.318,10.641 7.468,7.492 7.468,4.133 5.692,2.358 U1.25
  Bottom Layer w0.254: v1(-23.241,11.938) -23.089,11.786 3.353,11.786 4.217,10.922 v1(4.318,10.922)
NetP3_2: P3.2 U1.21 | length 29.3
  Top Layer w0.254: U1.21 6.318,-1.732 6.934,-2.349 8.954,-2.349 v1(17.272,5.969)
  Bottom Layer w0.254: v1(17.272,5.969) P3.2
NetP3_3: P3.3 U1.20 | length 30.3
  Top Layer w0.254: U1.20 7.89,-4.496 9.347,-4.496 v1(18.542,4.699)
  Bottom Layer w0.254: v1(18.542,4.699) P3.3
NetP3_4: P3.4 U1.19 | length 31.1
  Top Layer w0.254: U1.19 7.368,-5.105 11.278,-5.105 v1(20.701,4.318)
  Bottom Layer w0.254: v1(20.701,4.318) 20.701,5.996 25.881,11.176 P3.4
NetP3_7: P3.7 U1.30 | length 28.7
  Top Layer w0.254: U1.30 v1(4.849,7.112)
  Bottom Layer w0.254: v1(4.849,7.112) 14.097,7.112 19.685,1.524 25.527,1.524 P3.7
NetP3_8: P3.8 U1.29 | length 27
  Top Layer w0.254: U1.29 v1(5.08,6.211)
  Bottom Layer w0.254: v1(5.08,6.211) 12.712,6.211 18.009,0.914 27.457,0.914 P3.8
NetP3_9: P3.9 U1.28 | length 26.9
  Top Layer w0.254: U1.28 v1(5.207,5.207)
  Bottom Layer w0.254: v1(5.207,5.207) 11.684,5.207 18.415,-1.524 P3.9
NetR4_2: R4.2 USBMicroB1.2 | length 12.5
  Top Layer w0.254: USBMicroB1.2 -0.523,-48.656 1.118,-47.015 4.446,-47.015 6.985,-44.477 R4.2
NetR6_2: R6.2 USBMicroB1.3 | length 13.3
  Top Layer w0.254: USBMicroB1.3 0.127,-48.895 1.397,-47.625 4.699,-47.625 R6.2@9.807,-42.517
NetR21_1: R21.1 U2.16
NetU3_9: U3.9 U4.14 | length 100.3
  Top Layer w0.254: U3.9 -20.066,-36.699 -25.49,-31.275 -25.49,-21.016 -28.792,-17.714 -28.792,19.936 -4.912,43.815 -2.54,43.815 U4.14@-1.905,43.18
PB7: P3.6 U1.12 U2.6 | length 54.1
  Top Layer w0.254: U1.12 1.963,-7.62 v1(3.81,-7.62) ; v1(8.128,-8.128) 10.514,-8.128 22.351,3.708 24.105,3.708 26.492,6.096 P3.6 24.809,8.846 24.809,15.467 23.749,16.527 23.749,25.527
  Bottom Layer w0.254: v1@3.81,-7.747 v1(3.81,-7.62) 3.962,-7.772 5.715,-7.772 6.045,-8.103 6.655,-8.103 6.782,-7.976 7.796,-7.976 7.948,-8.128 v1(8.128,-8.128)
PD0: P3.5 U1.18 U3.13 U4.13 | length 131.7
  Top Layer w0.254: U3.13 -14.986,-40.64 -13.69,-41.936 -9.425,-41.936 -3.81,-36.321 v1(-3.81,-27.813) ; v1(-3.81,-23.495) -3.81,-19.685 3.073,-12.802 3.607,-12.802 4.039,-12.37 4.039,-8.523 6.846,-5.715 ; U4.13@-0.635,43.086 U4.13 -0.635,40.386 0.762,38.989 4.699,38.989 11.557,32.131 11.557,26.797 24.199,14.155 24.199,7.981 23.368,7.15 v1(23.368,4.445) 22.225,4.445 12.065,-5.715 6.846,-5.715 ; U1.18 6.846,-5.715
  Bottom Layer w0.254: v1(-3.81,-27.813) v1(-3.81,-23.495) ; v1(23.368,4.445) P3.5
PD5: P2.13 U1.22 U2.1 | length 86
  Top Layer w0.254: v1(5.588,10.541) 5.588,10.233 8.763,7.058 v1(8.763,2.286) ; U1.22 8.104,-1.167 v1(8.763,-0.508)
  Bottom Layer w0.254: P2.13 -23.495,13.716 -22.174,12.395 3.887,12.395 v1@5.588,10.694 ; v1(5.588,10.541) v1@5.588,10.694 ; 5.817,47.473 5.817,23.19 5.588,22.961 v1@5.588,10.694 ; v1(8.763,-0.508) v1(8.763,2.286)
PE2: P3.15 U1.33 | length 73.3
  Top Layer w0.254: v1(-0.381,8.371) U1.33 ; v1(25.273,19.304) 25.998,20.029 28.509,20.029 28.792,19.746 28.792,-15.531 P3.15
  Bottom Layer w0.254: v1(-0.381,8.371) 0.646,9.398 15.367,9.398 v1(25.273,19.304)
PE6: P3.14 U1.1 | length 49.3
  Top Layer w0.254: v1(-9.525,-8.89) -9.525,-3.868 U1.1
  Bottom Layer w0.254: v1(-9.525,-8.89) -4.191,-14.224 -1.524,-14.224 -0.127,-15.621 4.572,-15.621 5.969,-14.224 P3.14
Q0: R1.1 U3.15 | length 11.7
  Top Layer w0.254: U3.15 -12.446,-37.896 -10.393,-35.844 -10.393,-33.733 R1.1
Q1: R3.1 U3.1 | length 4.9
  Top Layer w0.254: U3.1 -11.176,-32.766 -9.452,-31.042 R3.1
Q2: R5.1 U3.2 | length 4.4
  Top Layer w0.254: U3.2 -12.446,-32.385 -11.92,-31.859 R5.1
Q3: R7.1 U3.3 | length 4.5
  Top Layer w0.254: R7.1 -14.387,-31.587 -13.716,-32.258 U3.3
Q4: R8.1 U3.4 | length 5
  Top Layer w0.254: R8.1 -14.986,-32.194 U3.4
Q5: R9.1 U3.5 | length 5.5
  Top Layer w0.254: R9.1 -16.256,-33.391 U3.5
Q6: R10.1 U3.6 | length 6.9
  Top Layer w0.254: R10.1 -19.763,-32.352 -18.194,-32.352 -17.526,-33.02 U3.6
Q7: R11.1 U3.7 | length 8
  Top Layer w0.254: R11.1 -21.621,-32.961 -18.982,-32.961 -18.796,-33.147 U3.7
Q8: R12.1 U4.15 | length 12.1
  Top Layer w0.254: R12.1 -8.382,33.909 -5.228,37.063 -5.228,38.3 -3.175,40.352 U4.15
Q9: R13.1 U4.1 | length 5.4
  Top Layer w0.254: R13.1 -5.969,34.036 -4.445,35.56 U4.1
Q10: R14.1 U4.2 | length 4.9
  Top Layer w0.254: R14.1 -3.556,34.925 -3.175,35.306 U4.2
Q11: R15.1 U4.3 | length 5.1
  Top Layer w0.254: U4.3 -1.905,35.052 -1.143,34.29 R15.1
Q12: R16.1 U4.4 | length 5.6
  Top Layer w0.254: U4.4 -0.635,35.433 1.27,33.528 R16.1
Q13: R17.1 U4.5 | length 6
  Top Layer w0.254: U4.5 0.635,35.56 3.683,32.512 R17.1
Q14: R18.1 U4.6 | length 7
  Top Layer w0.254: U4.6 1.905,35.56 3.404,34.061 4.265,34.061 R18.1
Q15: R19.1 U4.7 | length 8.2
  Top Layer w0.254: U4.7 3.175,35.56 4.064,34.671 6.068,34.671 R19.1
RESET: SW1.1 SW1.2 U1.13 | length 34.1
  Top Layer w0.254: U1.13 1.792,-6.258 2.409,-6.874 3.413,-6.874 v1(3.556,-6.731) ; v1(5.207,-9.525) 5.207,-13.716 4.699,-14.224 4.699,-15.494 6.985,-17.78 9.271,-17.78 v1(12.573,-21.082) ; v1(15.036,-23.545) 17.054,-25.563 SW1.2
  Bottom Layer w0.254: v1(3.556,-6.731) 2.413,-7.874 2.413,-8.89 2.997,-9.474 5.156,-9.474 v1(5.207,-9.525) ; v1(12.573,-21.082) v1(15.036,-23.545)
RST: P1.3
SCK: P1.2 P3.12 U1.9 U2.3 U3.11 U4.11 | length 160.7
  Top Layer w0.254: U3.11 -17.526,-41.324 -15.694,-43.155 -8.92,-43.155 -1.27,-35.505 v1(-1.27,-27.813) ; U1.9 -4.141,-7.535 -4.141,-8.332 -1.068,-11.405 2.388,-11.405 v1(2.413,-11.43) ; v1(-1.587,-23.177) -1.778,-22.987 -1.778,-19.558 3.302,-14.478 v1(3.429,-14.478) ; U4.11 1.905,43.18 2.508,43.783 7.237,43.783 9.615,41.405 9.615,39.661 P1.2 10.922,33.628 12.167,32.384 12.167,28.092 v1(19.621,20.638)
  Bottom Layer w0.254: v1(-1.587,-23.177) -1.587,-27.495 v1(-1.27,-27.813) ; 2.413,-11.811 v1(2.413,-11.43) ; v1(3.429,-14.478) 3.556,-14.478 2.413,-13.335 v1(2.413,-11.43) ; v1(19.621,20.638) 27.899,20.638 28.792,19.746 28.792,-7.911 P3.12 24.994,-11.709 4.317,-11.709 3.936,-11.328 2.515,-11.328 v1(2.413,-11.43)
SS: P3.13 U1.8 U2.2 U3.12 U4.12 | length 154.9
  Top Layer w0.254: U3.12 -16.256,-40.64 -14.35,-42.546 -9.173,-42.546 -2.54,-35.913 v1(-2.54,-27.813) ; U1.8 -4.826,-7.089 -4.826,-8.509 -1.168,-12.167 3.2,-12.167 v1(3.302,-12.065) v1(3.302,-8.382) ; v1(-2.54,-23.495) -2.54,-19.405 3.403,-13.462 v1(4.064,-13.462) ; U4.12 0.635,43.053 2.159,44.577 v1(5.08,44.577) ; v1(5.08,23.495) 5.08,12.192 9.779,7.493 v1(9.779,3.048)
  Bottom Layer w0.254: v1(-2.54,-27.813) v1(-2.54,-23.495) ; v1(3.302,-8.382) 5.462,-8.382 5.792,-8.712 6.908,-8.712 7.035,-8.585 7.543,-8.585 7.823,-8.865 8.433,-8.865 9.779,-7.519 v1(9.779,3.048) ; v1(4.064,-13.462) 3.302,-12.7 v1(3.302,-12.065) 3.81,-12.065 4.064,-12.319 25.246,-12.319 25.881,-11.684 P3.13 ; v1(5.08,23.495) v1(5.08,44.577)
USB: C2.2 C3.1 R2.2 U1.2 U1.7 U5.2 U5.4 U5.7 U5.8 USBMicroB1.1 | length 101.5
  Top Layer w0.254: U1.2 -6.228,-1.762 -6.228,-1.642 -5.702,-1.116 -4.954,-1.116 -2.813,-3.257 -2.813,-4.005 -3.34,-4.531 -3.459,-4.531 U1.7 -3.429,-4.621 -5.436,-6.627 -5.436,-14.122 -3.81,-15.748 v1(-3.302,-15.748) ; 0.635,-42.037 0.635,-41.275 1.143,-40.767 11.049,-40.767 11.938,-39.878 11.938,-38.481 v1(9.09,-35.633)
  Top Layer w0.508: C3.1 -16.51,-47.111 -16.51,-45.339 -15.367,-44.196 -10.588,-44.196 C2.2 -3.81,-47.117 ; U5.2 -0.635,-43.307 ; USBMicroB1.1@-1.333,-49.911 -1.663,-49.58 -1.663,-48.375 -1.778,-48.26 -2.667,-48.26 -3.81,-47.117 ; U5.7 0.889,-43.307 0.127,-42.545 ; U5.8 0.635,-42.037 0.127,-42.545 ; -3.81,-47.117 U5.4 -0.889,-45.847 -0.254,-45.212 -0.254,-43.688 -0.635,-43.307 ; -0.635,-43.307 0.127,-42.545
  Bottom Layer w0.254: v1(-3.302,-15.748) 8.509,-27.559 8.509,-35.052 v1(9.09,-35.633)
VCC: C1.2 C4.1 P1.4 P2.1 P3.16 U1.14 U1.24 U1.34 U1.44 U3.10 U3.16 U4.10 U4.16 U5.1 U5.5 U5.6 U6.3 | length 21.5
  Top Layer w0.254: v1(-18.796,-41.783) U3.10 ; U3.16 v1(-10.04,-39.744) ; C1.2@-7.818,-49.188 -7.667,-49.188 C1.2 ; v1(-5.624,41.021) U4.16 ; v1(3.175,39.878) U4.10
  Top Layer w0.508: C4.1 -12.186,-51.435 -10.795,-51.435 ; v1(-10.795,-51.943) -10.795,-51.435 ; C1.2 -9.191,-51.435 -10.795,-51.435 ; v1(-4.445,-42.037) U5.1 ; U5.5 U5.6 v1(4.572,-44.577)
VDD_PA: C8.2 C9.2 L3.2 U2.11 | length 4.7
  Top Layer w0.254: U2.11@22.055,55.534 22.177,55.007
  Top Layer w0.356: 22.177,55.007 22.56,54.768 22.719,54.079 L3.2
pads on no net: C5.2 U4.9 USBMicroB1.4 USBMicroB1.CASE
copper on no net:
  other v2: 0.059,49.022

## Text inside footprints (layer, text, board x,y; h text height)
C3: Top Overlay "+" at -21.298,-51.899 h1.25
C4: Top Overlay "+" at -16.472,-51.899 h1.25
P1: Top Overlay "6" at 15.494,40.386 h1.25; Top Overlay "3" at 15.494,37.846 h1.25; Top Overlay "1" at 6.35,37.846 h1.25; Top Overlay "4" at 5.842,40.386 h1.25